# Altium PCB filter_bank.PcbDoc
Units mil, origin at the board's own origin, x right, y up, seen from the top; angles counter-clockwise.
Board outline 1893.7 x 1338.58 mil, 2 copper layers (Top Layer, Bottom Layer); 109 components, 71 nets, 276 pads, 914 vias.
Unrouted connection lines stored in the file: 13.
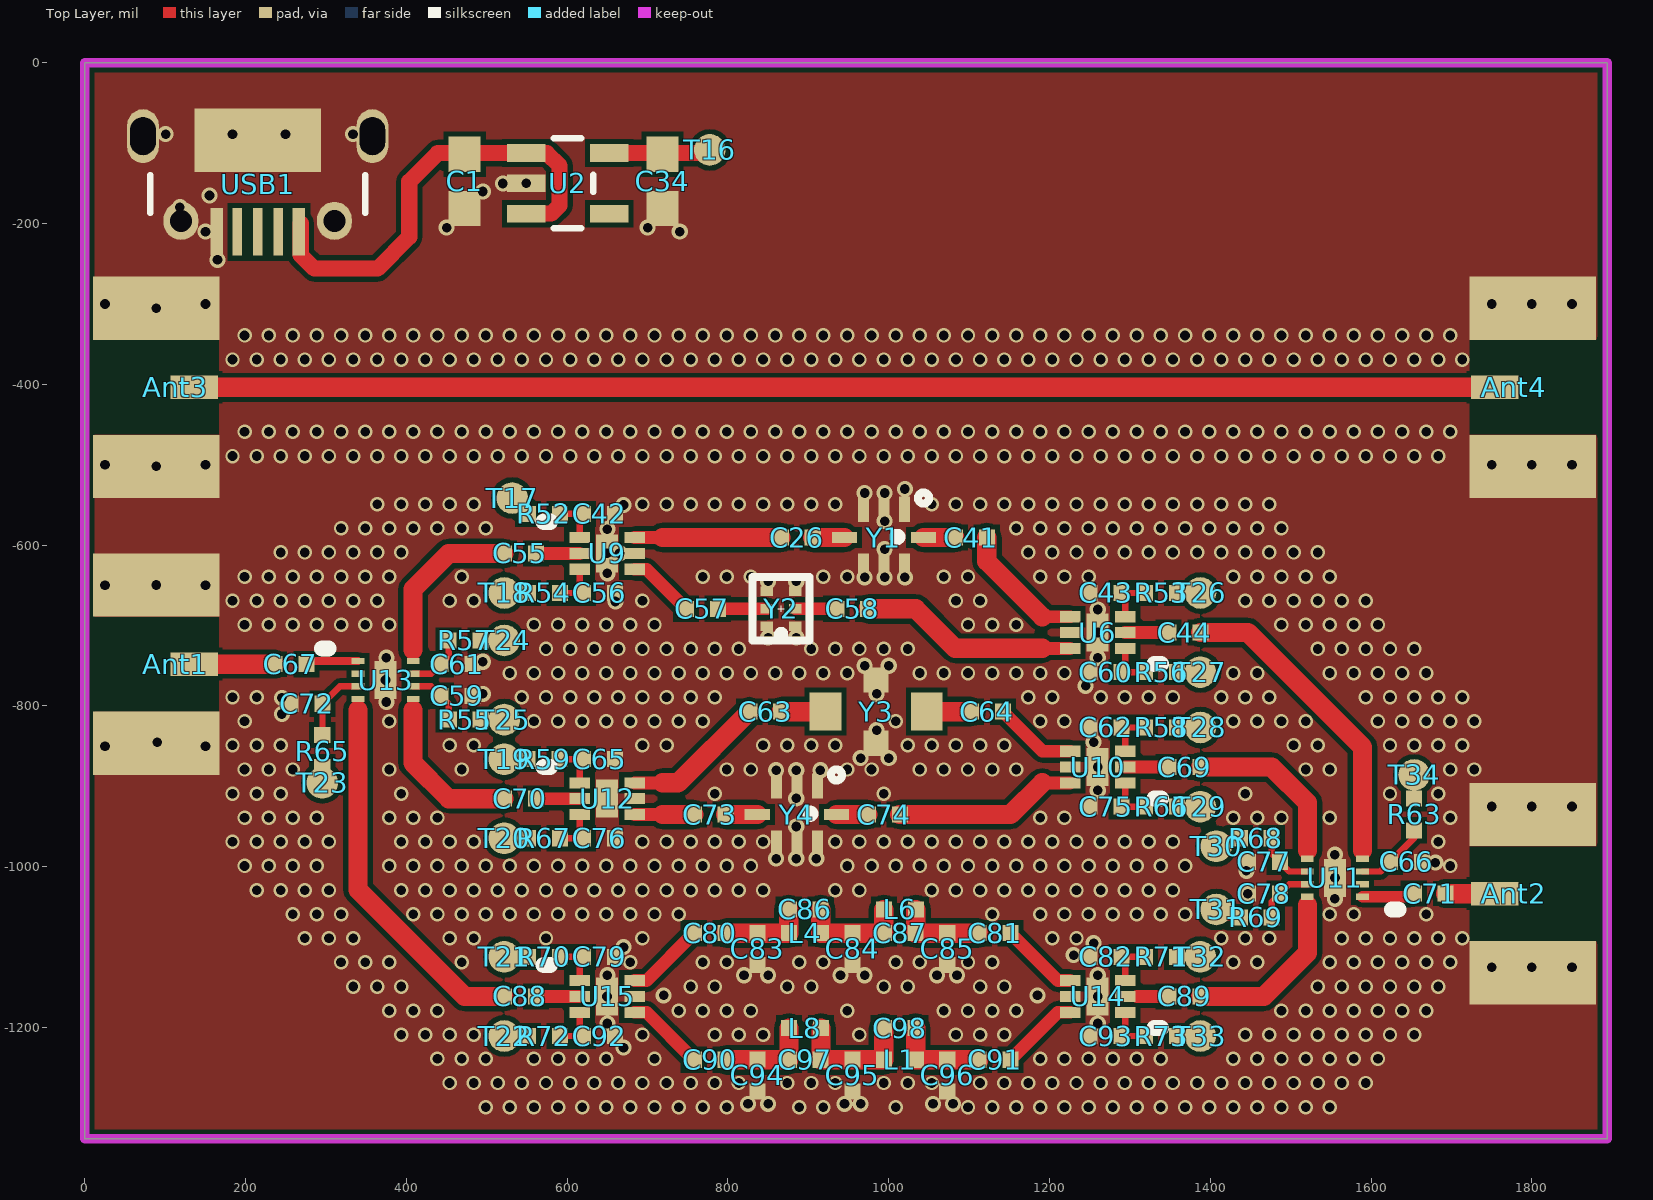
[diagram p0: Top Layer view]
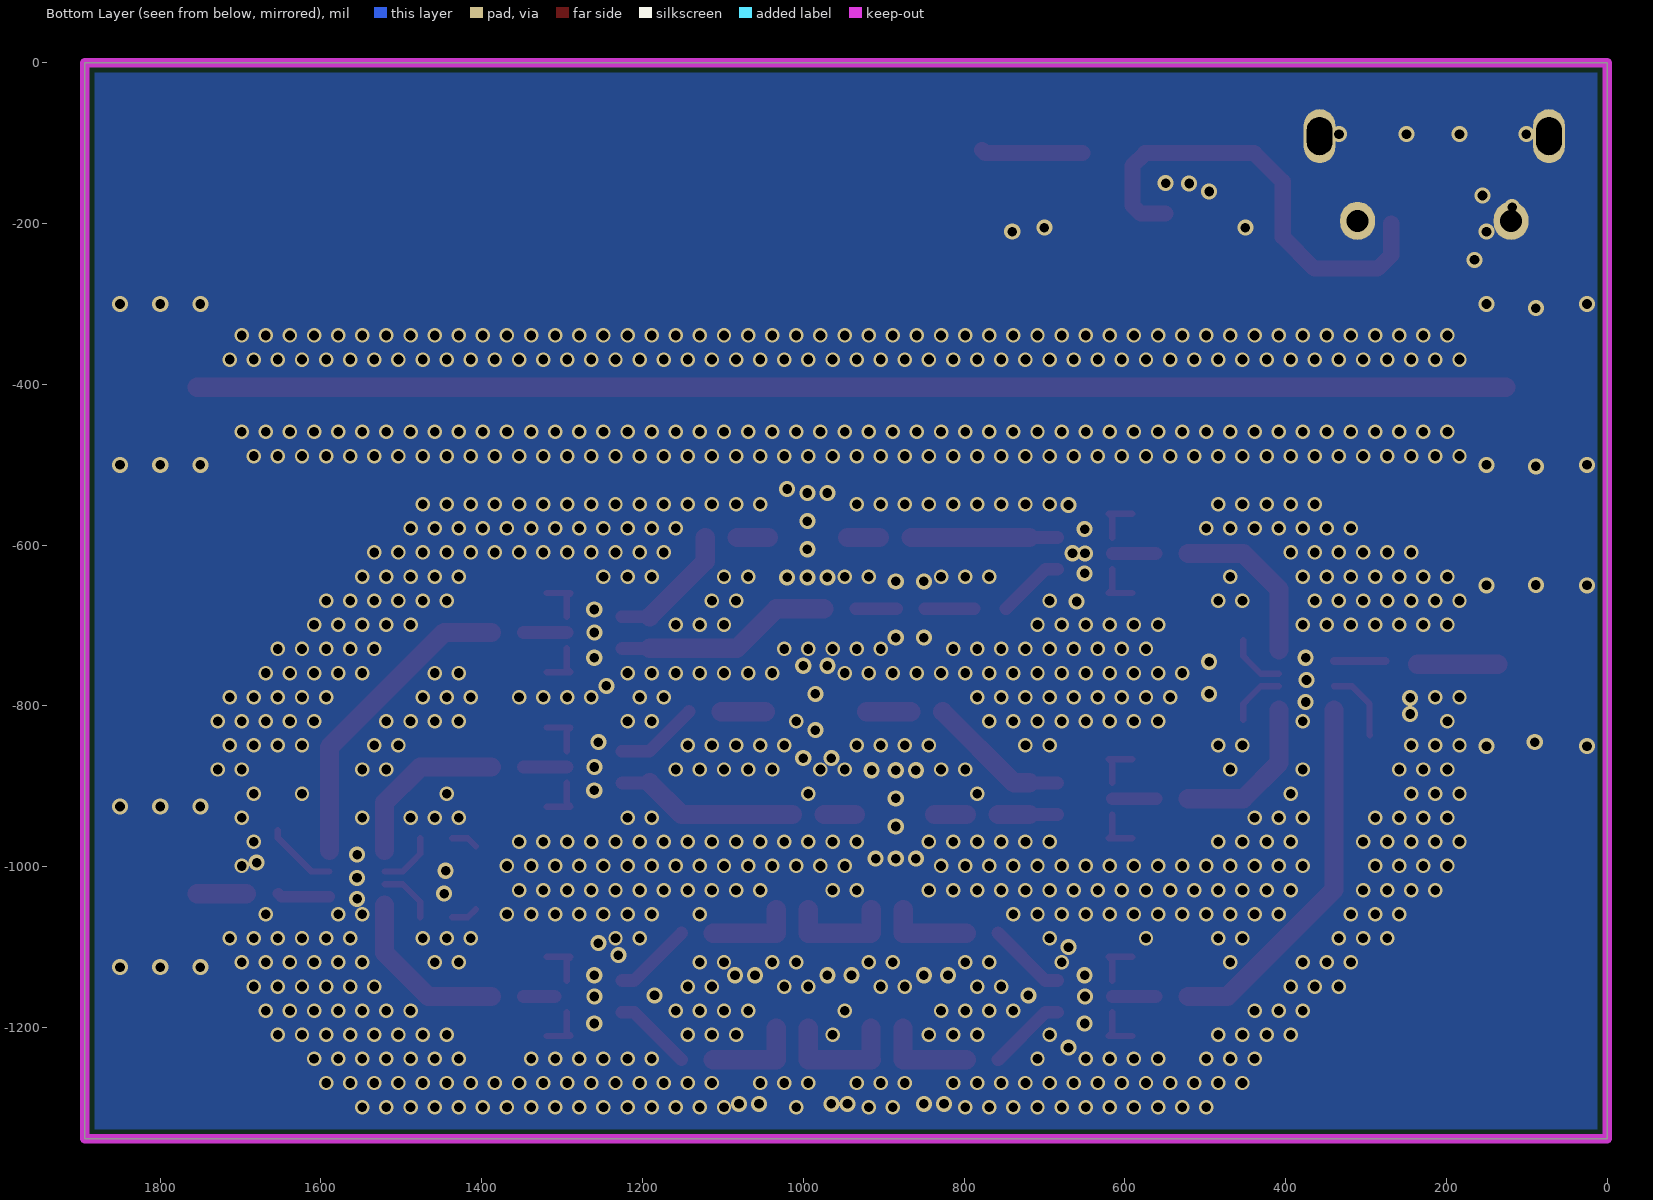
[diagram p1: Bottom Layer view, seen from below]

## Layer stack, top to bottom
Top Solder: solder mask 0.4, Solder Resist, Dk 3.5
Top Layer: signal copper 1.4
Dielectric 1: dielectric 12.6, FR-4, Dk 4.8
Bottom Layer: signal copper 1.4
Bottom Solder: solder mask 0.4, Solder Resist, Dk 3.5

## Board outline
0,-1338.58 0,0 1893.7,0 1893.7,-1338.58

## Design rules (kind name [scope] priority, off if disabled: settings)
Clearance [All] p1: gap=6
MinimumSolderMaskSliver [All] p1 off: minsoldermaskwidth=10
PlaneConnect [All] p1: planeconnectstyle=Direct reliefexpansion=20 reliefentries=4 reliefconductorwidth=10 reliefairgap=10
PolygonConnect [All] p1: connectstyle=Direct reliefconductorwidth=10 reliefentries=4 polygonreliefangle="90 Angle" airgapwidth=10
RoomDefinition power [InComponentClass('power')] p1: confinementstyle=ConfineIn formatcopy=TRUE lockcomponents=FALSE outline 2836.6,-1092.52 4293.29,-1092.52 4293.29,-600.4 2836.6,-600.4
RoomDefinition filter_bank [InComponentClass('filter_bank')] p2 off: confinementstyle=ConfineIn formatcopy=TRUE lockcomponents=FALSE outline 2598.71,-44.1 -203.29,-44.1 -203.29,-2002.1 2598.71,-2002.1
RoutingVias [All] p1: holewidth=11.81 width=19.68 viastyle="Through Hole" minholewidth=11.81 minwidth=19.68 maxholewidth=28 maxwidth=50
SilkToBoardRegionClearance [All] p1 off:
SilkToSilkClearance [All] p1 off: silktosilkclearance=10
SilkToSolderMaskClearance [IsPad] p1 off: minsilkscreentomaskgap=10 clearancetoexposedcopper=TRUE
SolderMaskExpansion [All] p1: expansion=4
UnpouredPolygon [All] p1: allowunpoured=FALSE
Width [All] p1: maxlimit=30 minlimit=6 preferedwidth=10
24 further rules are at their usual default settings.

## Classes and differential pairs
component class filter_bank: C26 C41 C42 C43 C44 C55 C56 C57 C58 C59 C60 C61 C62 C63 C64 C65 C66 C67 C69 C70 C71 C72 C73 C74 C75 C76 C77 C78 C79 C80 C81 C82 C83 C84 C85 C86 C87 C88 C89 C90 C91 C92 C93 C94 C95 C96 C97 C98 L1 L4 L6 L8 R52 R53 R54 R55 R56 R57 R58 R59 R63 R65 R66 R67 R68 R69 R70 R71 R72 R73 U6 U9 U10 U11 U12 U13 U14 U15 Y1 Y2 Y3 Y4
component class power: Ant1 Ant2 Ant3 Ant4 C1 C34 T16 U2 USB1

## Components (designator, comment, footprint, x,y, rotation, side; value= is the part's Value field where it differs from the comment)
Ant1 "Antenna" SMA-2 88.58,-649.61 r270 top
Ant2 "Antenna" SMA-2 1801.18,-1131.89 r90 top
Ant3 "Antenna" SMA-2 88.58,-305.12 r270 top
Ant4 "Antenna" SMA-2 1801.18,-501.97 r90 top
C1 "4.7uF" 0603 472.44,-147.64 r90 top
C26 "10pF" 0402 885.83,-590.55 r180 top
C34 "4.7uF" 0603 718.5,-147.64 r90 top
C41 "10pF" 0402 1102.36,-590.55 r180 top
C42 "47pF" 0402 639.76,-561.02 r180 top
C43 "47pF" 0402 1269.69,-659.45 r0 top
C44 "10pF" 0402 1368.11,-708.66 r180 top
C55 "10pF" 0402 541.34,-610.24 r180 top
C56 "47pF" 0402 639.76,-659.45 r180 top
C57 "10pF" 0402 767.72,-679.13 r180 top
C58 "10pF" 0402 954.72,-679.13 r180 top
C59 "47pF" 0402 462.6,-787.4 r180 top
C60 "47pF" 0402 1269.69,-757.87 r0 top
C61 "47pF" 0402 462.6,-748.03 r180 top
C62 "47pF" 0402 1269.69,-826.77 r0 top
C63 "22pF" 0402 846.46,-807.09 r180 top
C64 "22pF" 0402 1122.05,-807.09 r0 top
C65 "47pF" 0402 639.76,-866.14 r180 top
C66 "47pF" 0402 1643.7,-994.09 r180 top
C67 "47pF" 0402 255.91,-748.03 r180 top
C69 "22pF" 0402 1368.11,-875.98 r180 top
C70 "22pF" 0402 541.34,-915.35 r180 top
C71 "47pF" 0402 1673.23,-1033.46 r180 top
C72 "47pF" 0402 275.59,-797.24 r0 top
C73 "47pF" 0402 777.56,-935.04 r180 top
C74 "47pF" 0402 994.09,-935.04 r180 top
C75 "47pF" 0402 1269.69,-925.2 r0 top
C76 "47pF" 0402 639.76,-964.57 r180 top
C77 "47pF" 0402 1466.54,-994.09 r0 top
C78 "47pF" 0402 1466.54,-1033.47 r0 top
C79 "47pF" 0402 639.76,-1112.21 r180 top
C80 "100pF" 0402 777.56,-1082.68 r180 top
C81 "100pF" 0402 1131.89,-1082.68 r180 top
C82 "47pF" 0402 1269.69,-1112.21 r0 top
C83 "NC" 0402 836.61,-1102.36 r90 top
C84 "NC" 0402 954.72,-1102.36 r90 top
C85 "NC" 0402 1072.84,-1102.36 r90 top
C86 "NC" 0402 895.67,-1053.15 r180 top
C87 "NC" 0402 1013.78,-1082.68 r180 top
C88 "1nF" 0402 541.34,-1161.42 r180 top
C89 "1nF" 0402 1368.11,-1161.42 r180 top
C90 "1nF" 0402 777.56,-1240.16 r180 top
C91 "1nF" 0402 1131.89,-1240.16 r180 top
C92 "47pF" 0402 639.76,-1210.63 r180 top
C93 "47pF" 0402 1269.69,-1210.63 r0 top
C94 "NC" 0402 836.61,-1259.84 r90 top
C95 "NC" 0402 954.72,-1259.84 r90 top
C96 "NC" 0402 1072.84,-1259.84 r90 top
C97 "NC" 0402 895.67,-1240.16 r180 top
C98 "NC" 0402 1013.78,-1200.79 r180 top
L1 "0R" 0402 1013.78,-1240.16 r0 top
L4 "0R" 0402 895.67,-1082.68 r0 top
L6 "0R" 0402 1013.78,-1053.15 r0 top
L8 "0R" 0402 895.67,-1200.79 r0 top
R52 "200" 0402 570.87,-561.02 r0 top
R53 "200" 0402 1338.58,-659.45 r0 top
R54 "200" 0402 570.87,-659.45 r0 top
R55 "200" 0402 472.44,-816.93 r0 top
R56 "200" 0402 1338.58,-757.87 r0 top
R57 "200" 0402 472.44,-718.5 r180 top
R58 "200" 0402 1338.58,-826.77 r0 top
R59 "200" 0402 570.87,-866.14 r180 top
R63 "200" 0402 1653.54,-935.04 r90 top
R65 "200" 0402 295.28,-856.3 r90 top
R66 "200" 0402 1338.58,-925.2 r0 top
R67 "200" 0402 570.87,-964.57 r0 top
R68 "200" 0402 1456.69,-964.57 r180 top
R69 "200" 0402 1456.69,-1062.99 r180 top
R70 "200" 0402 570.87,-1112.21 r0 top
R71 "200" 0402 1338.58,-1112.21 r0 top
R72 "200" 0402 570.87,-1210.63 r0 top
R73 "200" 0402 1338.58,-1210.63 r0 top
T16 "TestPad" "TestPad - 1mm" 777.56,-108.27 r90 top
T17 "TestPad" "TestPad - 1mm" 531.5,-541.34 r90 top (schematic designator T16)
T18 "TestPad" "TestPad - 1mm" 521.65,-659.45 r90 top (schematic designator T16)
T19 "TestPad" "TestPad - 1mm" 521.65,-866.14 r90 top (schematic designator T16)
T20 "TestPad" "TestPad - 1mm" 521.65,-964.57 r90 top (schematic designator T16)
T21 "TestPad" "TestPad - 1mm" 521.65,-1112.2 r90 top (schematic designator T16)
T22 "TestPad" "TestPad - 1mm" 521.65,-1210.63 r90 top (schematic designator T16)
T23 "TestPad" "TestPad - 1mm" 295.28,-895.67 r90 top (schematic designator T16)
T24 "TestPad" "TestPad - 1mm" 521.65,-718.5 r90 top (schematic designator T16)
T25 "TestPad" "TestPad - 1mm" 521.65,-816.93 r90 top (schematic designator T16)
T26 "TestPad" "TestPad - 1mm" 1387.8,-659.45 r90 top (schematic designator T16)
T27 "TestPad" "TestPad - 1mm" 1387.8,-757.87 r90 top (schematic designator T16)
T28 "TestPad" "TestPad - 1mm" 1387.8,-826.77 r90 top (schematic designator T16)
T29 "TestPad" "TestPad - 1mm" 1387.8,-925.2 r90 top (schematic designator T16)
T30 "TestPad" "TestPad - 1mm" 1407.48,-974.41 r90 top (schematic designator T16)
T31 "TestPad" "TestPad - 1mm" 1407.48,-1053.15 r90 top (schematic designator T16)
T32 "TestPad" "TestPad - 1mm" 1387.8,-1112.2 r90 top (schematic designator T16)
T33 "TestPad" "TestPad - 1mm" 1387.8,-1210.63 r90 top (schematic designator T16)
T34 "TestPad" "TestPad - 1mm" 1653.54,-885.83 r90 top (schematic designator T16)
U2 "LP5907" SOT23-5 600.39,-149.59 r270 top
U6 "SKY13320" SKY65404-31 1259.84,-708.66 r180 top
U9 "SKY13320" SKY65404-31 649.61,-610.24 r0 top
U10 "SKY13320" SKY65404-31 1259.84,-875.98 r180 top
U11 "SKY13417" SKY13317 1555.12,-1013.78 r180 top
U12 "SKY13320" SKY65404-31 649.61,-915.35 r0 top
U13 "SKY13417" SKY13317 374.02,-767.72 r0 top
U14 "SKY13320" SKY65404-31 1259.84,-1161.42 r180 top
U15 "SKY13320" SKY65404-31 649.61,-1161.42 r0 top
USB1 "USB Micro Type B" MICRO-YZX 215,20 r180 top
Y1 "5515LP15A730/0868LP15A020" 5515LP15A730/0868LP15A020 994.09,-590.55 r180 top
Y2 "3550LP14A300" 3550LP14A300 866.14,-679.13 r0 top
Y3 "1748LP18A075" 1748LP18A075 984.25,-807.09 r0 top
Y4 "5515LP15A730/0868LP15A020" 5515LP15A730/0868LP15A020 885.83,-935.04 r180 top

## Footprints (in the part's own frame and the unit in brackets; to place one, negate y for a bottom-side part, rotate by r counter-clockwise, add the part's x,y. Pads: shape width x height; smd on the part's side, far side on the other; paste and mask are expansions set on the pad)
0402 [mil] "0402-RES"
  rect 20x20 smd: 1(-19.68,0) 2(20,0)
0603 [mil] "0603-RES"
  rect 44x40 smd: 1(-33.46,0) 2(34,0)
1748LP18A075 [mm]
  rect 1x1.2 smd: 1(-1.6,0) 2(1.6,0)
  rect 0.8x0.8 smd: 3(0,-1) 4(0,1)
  body extent -1.6,-0.8 1.6,0.8, height 1
3550LP14A300 [mm]
  rect 0.4x0.3 smd: 1(-0.45,0.55) 2(-0.45,0) 3(-0.45,-0.55) 4(0.45,-0.55) 5(0.45,0) 6(0.45,0.55)
  silkscreen extent -0.9,-1 0.9,1, body extent -0.4,-0.8 0.4,0.8, height 0.6
5515LP15A730/0868LP15A020 [mm]
  rect 0.35x0.8 smd: 1(-0.65,-0.9) 2(0,-0.9) 3(0.65,-0.9) 5(0.65,0.9) 6(0,0.9) 7(-0.65,0.9)
  rect 0.8x0.35 smd: 4(1.25,0) 8(-1.25,0)
  silkscreen extent -1.43,-1.42 -0.3,0.1, body extent -1,-0.6 1,0.6, height 0.85
MICRO-YZX [mm]
  rect 0.4x1.5 smd: 1(-1.3,5.85) 5(1.3,5.85)
  rect 0.3x1.5 smd: 2(-0.65,5.85) 3(0,5.85) 4(0.65,5.85)
  oval 1x1.7 hole 0.8 slot 1.2 at 90 deg: 5(-3.625,2.82) 5(3.625,2.82)
  oval 1.1x1.2 hole 0.7: 5(-2.425,5.5) 5(2.425,5.5)
  rect 4x2 smd: 5(0,2.95)
  silkscreen extent -3.4,4.05 3.4,5.25, body extent -4.02,0.33 3.98,5.93, height 2.6
SKY13317 [mm]
  rect 0.7x1.2 smd: 0(0,0)
  rect 0.4x0.2 smd: 1(-0.87,0.6) 2(-0.87,0.2) 3(-0.87,-0.2) 4(-0.87,-0.6) 5(0.87,-0.6) 6(0.87,-0.2) 7(0.87,0.2) 8(0.87,0.6)
  silkscreen extent -2,1 -1.8,1, body extent -0.75,-0.75 0.75,0.75, height 0.45
SKY65404-31 [mm]
  rect 0.7x1.2 smd: 0(0,0)
  rect 0.65x0.35 smd: 1(-0.87,0.5) 2(-0.87,0) 3(-0.87,-0.5) 4(0.87,-0.5) 5(0.87,0) 6(0.87,0.5)
  silkscreen extent -2,1 -1.8,1, body extent -0.75,-0.75 0.75,0.75, height 0.45
SMA-2 [mm]
  rect 0.75x1.5 smd: 1(2.5,1.2)
  rect 2x4 smd: GND(0,0) GND(5,0)
  Top Layer pour cut-out: 1,2 4,2 4,-2 1,-2
SOT23-5 [mil] "SOT23-5"
  rect 22x48 smd: 1(-37.4,-51.19) 2(0,-51.19) 3(38,-51.19) 4(38,52) 5(-37.4,52)
  silkscreen extent -56,-17 56,32
"TestPad - 1mm" [mm]
  round 1 smd: 1(0,0)

## Part data
C1 C26 C34 C41 C42 C43 C44 C55 C56 C57 C58 C59 C60 C61 C62 C63 C64 C65 C66 C67 C69 C70 C71 C72 C73 C74 C75 C76 C77 C78 C79 C80 C81 C82 C83 C84 C85 C86 C87 C88 C89 C90 C91 C92 C93 C94 C95 C96 C97 C98: library part Cap, "Capacitor"
L1 L4 L6 L8: library part L/2.5*2.0
R52 R53 R54 R55 R56 R57 R58 R59 R63 R65 R66 R67 R68 R69 R70 R71 R72 R73: library part Res2, "Resistor"
USB1: library part USB_Micro_TypeB, "Connector SMD USB Micro Type B middle mount"

## Via types
v1: diameter 18, hole 12, Top Layer to Bottom Layer, tented both sides, 800 vias
v2: diameter 20, hole 12, Top Layer to Bottom Layer, tented both sides, 114 vias

## Nets (pads, with @x,y where several pads share a name; then routed paths per layer and width w, separated by ;. In a path a pad name is that pad's centre, name@x,y a point inside that pad or via, vN(x,y) a via of type N, cw(c..) or ccw(c..) an arc to the next point about the centre after c; other vN are vias at no path point)
3.3: C34.2 T16.1 U2.5 | length 126.8
  Top Layer w20: U2.5 773.64,-112.19 T16.1
GND: Ant1.GND Ant2.GND Ant3.GND Ant4.GND C1.1 C34.1 C42.1 C43.1 C56.1 C59.1 C60.1 C61.1 C62.1 C65.1 C66.1 C72.1 C75.1 C76.1 C77.1 C78.1 C79.1 C82.1 C83.1 C84.1 C85.1 C92.1 C93.1 C94.1 C95.1 C96.1 U2.2 U6.0 U6.5 U9.0 U9.5 U10.0 U10.5 U11.0 U12.0 U12.5 U13.0 U14.0 U14.5 U15.0 U15.5 USB1.5 Y1.1 Y1.2 Y1.3 Y1.5 Y1.6 Y1.7 Y2.1 Y2.3 Y2.4 Y2.6 Y3.3 Y3.4 Y4.1 Y4.2 Y4.3 Y4.5 Y4.6 Y4.7
  other v1: 498.62,-1299.06 528.62,-1299.06 558.62,-1299.06 588.62,-1299.06 618.62,-1299.06 648.62,-1299.06 678.62,-1299.06 708.62,-1299.06 738.62,-1299.06 768.62,-1299.06 798.62,-1299.06 888.62,-1299.06 918.62,-1299.06 1008.62,-1299.06 1098.62,-1299.06 1128.62,-1299.06 1158.62,-1299.06 1188.62,-1299.06 1218.62,-1299.06 1248.62,-1299.06 1278.62,-1299.06 1308.62,-1299.06 1338.62,-1299.06 1368.62,-1299.06 1398.62,-1299.06 1428.62,-1299.06 1458.62,-1299.06 1488.62,-1299.06 1518.62,-1299.06 1548.62,-1299.06 453.62,-1269.06 483.62,-1269.06 513.62,-1269.06 543.62,-1269.06 573.62,-1269.06 603.62,-1269.06 633.62,-1269.06 663.62,-1269.06 693.62,-1269.06 723.62,-1269.06 753.62,-1269.06 783.62,-1269.06 813.62,-1269.06 873.62,-1269.06 903.62,-1269.06 933.62,-1269.06 993.62,-1269.06 1023.62,-1269.06 1053.62,-1269.06 1113.62,-1269.06 1143.62,-1269.06 1173.62,-1269.06 1203.62,-1269.06 1233.62,-1269.06 1263.62,-1269.06 1293.62,-1269.06 1323.62,-1269.06 1353.62,-1269.06 1383.62,-1269.06 1413.62,-1269.06 1443.62,-1269.06 1473.62,-1269.06 1503.62,-1269.06 1533.62,-1269.06 1563.62,-1269.06 1593.62,-1269.06 438.62,-1239.06 468.62,-1239.06 498.62,-1239.06 558.62,-1239.06 588.62,-1239.06 618.62,-1239.06 648.62,-1239.06 708.62,-1239.06 1188.62,-1239.06 1218.62,-1239.06 1248.62,-1239.06 1278.62,-1239.06 1308.62,-1239.06 1338.62,-1239.06 1428.62,-1239.06 1458.62,-1239.06 1488.62,-1239.06 1518.62,-1239.06 1548.62,-1239.06 1578.62,-1239.06 1608.62,-1239.06 393.62,-1209.06 423.62,-1209.06 453.62,-1209.06 483.62,-1209.06 693.62,-1209.06 783.62,-1209.06 813.62,-1209.06 843.62,-1209.06 963.62,-1209.06 1083.62,-1209.06 1113.62,-1209.06 1143.62,-1209.06 1443.62,-1209.06 1473.62,-1209.06 1503.62,-1209.06 1533.62,-1209.06 1563.62,-1209.06 1593.62,-1209.06 1623.62,-1209.06 1653.62,-1209.06 378.62,-1179.06 408.62,-1179.06 438.62,-1179.06 738.62,-1179.06 768.62,-1179.06 798.62,-1179.06 828.62,-1179.06 948.62,-1179.06 1068.62,-1179.06 1098.62,-1179.06 1128.62,-1179.06 1158.62,-1179.06 1488.62,-1179.06 1518.62,-1179.06 1548.62,-1179.06 1578.62,-1179.06 1608.62,-1179.06 1638.62,-1179.06 1668.62,-1179.06 333.62,-1149.06 363.62,-1149.06 393.62,-1149.06 753.62,-1149.06 783.62,-1149.06 873.62,-1149.06 903.62,-1149.06 993.62,-1149.06 1023.62,-1149.06 1113.62,-1149.06 1143.62,-1149.06 1533.62,-1149.06 1563.62,-1149.06 1593.62,-1149.06 1623.62,-1149.06 1653.62,-1149.06 1683.62,-1149.06 318.62,-1119.06 348.62,-1119.06 378.62,-1119.06 468.62,-1119.06 678.62,-1119.06 768.62,-1119.06 798.62,-1119.06 888.62,-1119.06 918.62,-1119.06 1008.62,-1119.06 1038.62,-1119.06 1098.62,-1119.06 1128.62,-1119.06 1428.62,-1119.06 1458.62,-1119.06 1548.62,-1119.06 1578.62,-1119.06 1608.62,-1119.06 1638.62,-1119.06 1668.62,-1119.06 1698.62,-1119.06 273.62,-1089.06 303.62,-1089.06 333.62,-1089.06 453.62,-1089.06 483.62,-1089.06 573.62,-1089.06 693.62,-1089.06 1203.62,-1089.06 1233.62,-1089.06 1413.62,-1089.06 1443.62,-1089.06 1473.62,-1089.06 1563.62,-1089.06 1593.62,-1089.06 1623.62,-1089.06 1653.62,-1089.06 1683.62,-1089.06 1713.62,-1089.06 258.62,-1059.06 288.62,-1059.06 318.62,-1059.06 408.62,-1059.06 438.62,-1059.06 468.62,-1059.06 498.62,-1059.06 528.62,-1059.06 558.62,-1059.06 588.62,-1059.06 618.62,-1059.06 648.62,-1059.06 678.62,-1059.06 708.62,-1059.06 738.62,-1059.06 1128.62,-1059.06 1188.62,-1059.06 1218.62,-1059.06 1248.62,-1059.06 1278.62,-1059.06 1308.62,-1059.06 1338.62,-1059.06 1368.62,-1059.06 1548.62,-1059.06 1578.62,-1059.06 1668.62,-1059.06 213.62,-1029.06 243.62,-1029.06 273.62,-1029.06 303.62,-1029.06 393.62,-1029.06 423.62,-1029.06 453.62,-1029.06 483.62,-1029.06 513.62,-1029.06 543.62,-1029.06 573.62,-1029.06 603.62,-1029.06 633.62,-1029.06 663.62,-1029.06 693.62,-1029.06 723.62,-1029.06 753.62,-1029.06 783.62,-1029.06 813.62,-1029.06 843.62,-1029.06 933.62,-1029.06 963.62,-1029.06 1053.62,-1029.06 1083.62,-1029.06 1113.62,-1029.06 1143.62,-1029.06 1173.62,-1029.06 1203.62,-1029.06 1233.62,-1029.06 1263.62,-1029.06 1293.62,-1029.06 1323.62,-1029.06 1353.62,-1029.06 198.62,-999.06 228.62,-999.06 258.62,-999.06 288.62,-999.06 378.62,-999.06 408.62,-999.06 438.62,-999.06 468.62,-999.06 498.62,-999.06 528.62,-999.06 558.62,-999.06 588.62,-999.06 618.62,-999.06 648.62,-999.06 678.62,-999.06 708.62,-999.06 738.62,-999.06 768.62,-999.06 798.62,-999.06 828.62,-999.06 948.62,-999.06 978.62,-999.06 1008.62,-999.06 1038.62,-999.06 1068.62,-999.06 1098.62,-999.06 1128.62,-999.06 1158.62,-999.06 1188.62,-999.06 1218.62,-999.06 1248.62,-999.06 1278.62,-999.06 1308.62,-999.06 1338.62,-999.06 1368.62,-999.06 1698.62,-999.06 183.62,-969.06 213.62,-969.06 243.62,-969.06 273.62,-969.06 303.62,-969.06 393.62,-969.06 423.62,-969.06 453.62,-969.06 483.62,-969.06 693.62,-969.06 723.62,-969.06 753.62,-969.06 783.62,-969.06 813.62,-969.06 843.62,-969.06 933.62,-969.06 963.62,-969.06 993.62,-969.06 1023.62,-969.06 1053.62,-969.06 1083.62,-969.06 1113.62,-969.06 1143.62,-969.06 1173.62,-969.06 1203.62,-969.06 1233.62,-969.06 1263.62,-969.06 1293.62,-969.06 1323.62,-969.06 1353.62,-969.06 1683.62,-969.06 198.62,-939.06 228.62,-939.06 258.62,-939.06 288.62,-939.06 378.62,-939.06 408.62,-939.06 438.62,-939.06 1188.62,-939.06 1218.62,-939.06 1428.62,-939.06 1458.62,-939.06 1488.62,-939.06 1548.62,-939.06 1698.62,-939.06 183.62,-909.06 213.62,-909.06 243.62,-909.06 393.62,-909.06 783.62,-909.06 993.62,-909.06 1443.62,-909.06 1623.62,-909.06 1683.62,-909.06 198.62,-879.06 228.62,-879.06 258.62,-879.06 378.62,-879.06 468.62,-879.06 798.62,-879.06 828.62,-879.06 948.62,-879.06 978.62,-879.06 1038.62,-879.06 1068.62,-879.06 1098.62,-879.06 1128.62,-879.06 1158.62,-879.06 1518.62,-879.06 1548.62,-879.06 1698.62,-879.06 1728.62,-879.06 183.62,-849.06 213.62,-849.06 243.62,-849.06 453.62,-849.06 483.62,-849.06 693.62,-849.06 723.62,-849.06 843.62,-849.06 873.62,-849.06 903.62,-849.06 933.62,-849.06 1023.62,-849.06 1053.62,-849.06 1083.62,-849.06 1113.62,-849.06 1143.62,-849.06 1503.62,-849.06 1533.62,-849.06 1623.62,-849.06 1653.62,-849.06 1683.62,-849.06 1713.62,-849.06 198.62,-819.06 378.62,-819.06 558.62,-819.06 588.62,-819.06 618.62,-819.06 648.62,-819.06 678.62,-819.06 708.62,-819.06 738.62,-819.06 768.62,-819.06 1008.62,-819.06 1188.62,-819.06 1218.62,-819.06 1428.62,-819.06 1458.62,-819.06 1488.62,-819.06 1518.62,-819.06 1608.62,-819.06 1638.62,-819.06 1668.62,-819.06 1698.62,-819.06 1728.62,-819.06 183.62,-789.06 213.62,-789.06 543.62,-789.06 573.62,-789.06 603.62,-789.06 633.62,-789.06 663.62,-789.06 693.62,-789.06 723.62,-789.06 753.62,-789.06 783.62,-789.06 1173.62,-789.06 1203.62,-789.06 1263.62,-789.06 1293.62,-789.06 1323.62,-789.06 1353.62,-789.06 1413.62,-789.06 1443.62,-789.06 1473.62,-789.06 1593.62,-789.06 1623.62,-789.06 1653.62,-789.06 1683.62,-789.06 1713.62,-789.06 528.62,-759.06 558.62,-759.06 588.62,-759.06 618.62,-759.06 648.62,-759.06 678.62,-759.06 708.62,-759.06 738.62,-759.06 768.62,-759.06 798.62,-759.06 828.62,-759.06 858.62,-759.06 888.62,-759.06 918.62,-759.06 948.62,-759.06 1038.62,-759.06 1068.62,-759.06 1098.62,-759.06 1128.62,-759.06 1158.62,-759.06 1188.62,-759.06 1218.62,-759.06 1428.62,-759.06 1458.62,-759.06 1548.62,-759.06 1578.62,-759.06 1608.62,-759.06 1638.62,-759.06 1668.62,-759.06 573.62,-729.06 603.62,-729.06 633.62,-729.06 663.62,-729.06 693.62,-729.06 723.62,-729.06 753.62,-729.06 783.62,-729.06 813.62,-729.06 903.62,-729.06 933.62,-729.06 963.62,-729.06 993.62,-729.06 1023.62,-729.06 1533.62,-729.06 1563.62,-729.06 1593.62,-729.06 1623.62,-729.06 1653.62,-729.06 198.62,-699.06 228.62,-699.06 258.62,-699.06 288.62,-699.06 318.62,-699.06 348.62,-699.06 378.62,-699.06 558.62,-699.06 588.62,-699.06 618.62,-699.06 648.62,-699.06 678.62,-699.06 708.62,-699.06 1098.62,-699.06 1128.62,-699.06 1158.62,-699.06 1488.62,-699.06 1518.62,-699.06 1548.62,-699.06 1578.62,-699.06 1608.62,-699.06 183.62,-669.06 213.62,-669.06 243.62,-669.06 273.62,-669.06 303.62,-669.06 333.62,-669.06 363.62,-669.06 453.62,-669.06 483.62,-669.06 693.62,-669.06 1083.62,-669.06 1113.62,-669.06 1443.62,-669.06 1473.62,-669.06 1503.62,-669.06 1533.62,-669.06 1563.62,-669.06 1593.62,-669.06 198.62,-639.06 228.62,-639.06 258.62,-639.06 288.62,-639.06 318.62,-639.06 348.62,-639.06 378.62,-639.06 468.62,-639.06 768.62,-639.06 798.62,-639.06 828.62,-639.06 918.62,-639.06 948.62,-639.06 1068.62,-639.06 1098.62,-639.06 1188.62,-639.06 1218.62,-639.06 1248.62,-639.06 1428.62,-639.06 1458.62,-639.06 1488.62,-639.06 1518.62,-639.06 1548.62,-639.06 243.62,-609.06 273.62,-609.06 303.62,-609.06 333.62,-609.06 363.62,-609.06 393.62,-609.06 1173.62,-609.06 1203.62,-609.06 1233.62,-609.06 1263.62,-609.06 1293.62,-609.06 1323.62,-609.06 1353.62,-609.06 1383.62,-609.06 1413.62,-609.06 1443.62,-609.06 1473.62,-609.06 1503.62,-609.06 1533.62,-609.06 318.62,-579.06 348.62,-579.06 378.62,-579.06 408.62,-579.06 438.62,-579.06 468.62,-579.06 498.62,-579.06 1158.62,-579.06 1188.62,-579.06 1218.62,-579.06 1248.62,-579.06 1278.62,-579.06 1308.62,-579.06 1338.62,-579.06 1368.62,-579.06 1398.62,-579.06 1428.62,-579.06 1458.62,-579.06 1488.62,-579.06 363.62,-549.06 393.62,-549.06 423.62,-549.06 453.62,-549.06 483.62,-549.06 693.62,-549.06 723.62,-549.06 753.62,-549.06 783.62,-549.06 813.62,-549.06 843.62,-549.06 873.62,-549.06 903.62,-549.06 933.62,-549.06 1053.62,-549.06 1083.62,-549.06 1113.62,-549.06 1143.62,-549.06 1173.62,-549.06 1203.62,-549.06 1233.62,-549.06 1263.62,-549.06 1293.62,-549.06 1323.62,-549.06 1353.62,-549.06 1383.62,-549.06 1413.62,-549.06 1443.62,-549.06 1473.62,-549.06 183.62,-489.06 213.62,-489.06 243.62,-489.06 273.62,-489.06 303.62,-489.06 333.62,-489.06 363.62,-489.06 393.62,-489.06 423.62,-489.06 453.62,-489.06 483.62,-489.06 513.62,-489.06 543.62,-489.06 573.62,-489.06 603.62,-489.06 633.62,-489.06 663.62,-489.06 693.62,-489.06 723.62,-489.06 753.62,-489.06 783.62,-489.06 813.62,-489.06 843.62,-489.06 873.62,-489.06 903.62,-489.06 933.62,-489.06 963.62,-489.06 993.62,-489.06 1023.62,-489.06 1053.62,-489.06 1083.62,-489.06 1113.62,-489.06 1143.62,-489.06 1173.62,-489.06 1203.62,-489.06 1233.62,-489.06 1263.62,-489.06 1293.62,-489.06 1323.62,-489.06 1353.62,-489.06 1383.62,-489.06 1413.62,-489.06 1443.62,-489.06 1473.62,-489.06 1503.62,-489.06 1533.62,-489.06 1563.62,-489.06 1593.62,-489.06 1623.62,-489.06 1653.62,-489.06 1683.62,-489.06 198.62,-459.06 228.62,-459.06 258.62,-459.06 288.62,-459.06 318.62,-459.06 348.62,-459.06 378.62,-459.06 408.62,-459.06 438.62,-459.06 468.62,-459.06 498.62,-459.06 528.62,-459.06 558.62,-459.06 588.62,-459.06 618.62,-459.06 648.62,-459.06 678.62,-459.06 708.62,-459.06 738.62,-459.06 768.62,-459.06 798.62,-459.06 828.62,-459.06 858.62,-459.06 888.62,-459.06 918.62,-459.06 948.62,-459.06 978.62,-459.06 1008.62,-459.06 1038.62,-459.06 1068.62,-459.06 1098.62,-459.06 1128.62,-459.06 1158.62,-459.06 1188.62,-459.06 1218.62,-459.06 1248.62,-459.06 1278.62,-459.06 1308.62,-459.06 1338.62,-459.06 1368.62,-459.06 1398.62,-459.06 1428.62,-459.06 1458.62,-459.06 1488.62,-459.06 1518.62,-459.06 1548.62,-459.06 1578.62,-459.06 1608.62,-459.06 1638.62,-459.06 1668.62,-459.06 1698.62,-459.06 183.62,-369.06 213.62,-369.06 243.62,-369.06 273.62,-369.06 303.62,-369.06 333.62,-369.06 363.62,-369.06 393.62,-369.06 423.62,-369.06 453.62,-369.06 483.62,-369.06 513.62,-369.06 543.62,-369.06 573.62,-369.06 603.62,-369.06 633.62,-369.06 663.62,-369.06 693.62,-369.06 723.62,-369.06 753.62,-369.06 783.62,-369.06 813.62,-369.06 843.62,-369.06 873.62,-369.06 903.62,-369.06 933.62,-369.06 963.62,-369.06 993.62,-369.06 1023.62,-369.06 1053.62,-369.06 1083.62,-369.06 1113.62,-369.06 1143.62,-369.06 1173.62,-369.06 1203.62,-369.06 1233.62,-369.06 1263.62,-369.06 1293.62,-369.06 1323.62,-369.06 1353.62,-369.06 1383.62,-369.06 1413.62,-369.06 1443.62,-369.06 1473.62,-369.06 1503.62,-369.06 1533.62,-369.06 1563.62,-369.06 1593.62,-369.06 1623.62,-369.06 1653.62,-369.06 1683.62,-369.06 1713.62,-369.06 198.62,-339.06 228.62,-339.06 258.62,-339.06 288.62,-339.06 318.62,-339.06 348.62,-339.06 378.62,-339.06 408.62,-339.06 438.62,-339.06 468.62,-339.06 498.62,-339.06 528.62,-339.06 558.62,-339.06 588.62,-339.06 618.62,-339.06 648.62,-339.06 678.62,-339.06 708.62,-339.06 738.62,-339.06 768.62,-339.06 798.62,-339.06 828.62,-339.06 858.62,-339.06 888.62,-339.06 918.62,-339.06 948.62,-339.06 978.62,-339.06 1008.62,-339.06 1038.62,-339.06 1068.62,-339.06 1098.62,-339.06 1128.62,-339.06 1158.62,-339.06 1188.62,-339.06 1218.62,-339.06 1248.62,-339.06 1278.62,-339.06 1308.62,-339.06 1338.62,-339.06 1368.62,-339.06 1398.62,-339.06 1428.62,-339.06 1458.62,-339.06 1488.62,-339.06 1518.62,-339.06 1548.62,-339.06 1578.62,-339.06 1608.62,-339.06 1638.62,-339.06 1668.62,-339.06 1698.62,-339.06
  other v2: 825,-1295 850,-1295 945,-1295 965,-1295 1055,-1295 1080,-1295 670,-1225 650,-1195 1260,-1195 649.61,-1161.42 1259.84,-1161.42 720,-1160 1185,-1160 650,-1135 820,-1135 850,-1135 940,-1135 970,-1135 1060,-1135 1085,-1135 1260,-1135 1750,-1125 1800,-1125 1850,-1125 1230,-1110 670,-1100 1255,-1095 1555,-1040 1446.85,-1033.47 1555.12,-1013.78 1445,-1005 1680,-995 860,-990 885,-990 910,-990 1555,-985 885,-950 1750,-925 1800,-925 1850,-925 885,-915 1260,-905 860,-880 885,-880 915,-880 1259.84,-875.98 965,-865 1000,-865 25,-850 150,-850 90,-845 1255,-845 985,-830 245,-810 375,-795 245,-790 495,-785 985,-785 1245,-775 374.02,-767.72 970,-750 1000,-750 495,-745 375,-740 1260,-740 850,-715 885,-715 1259.84,-708.66 1260,-680 660,-670 25,-650 88.58,-649.61 150,-650 850,-645 885,-645 970,-640 995,-640 1020,-640 650,-635 649.61,-610.24 665,-610 995,-605 650,-580 995,-570 670,-550 970,-535 995,-535 1020,-530 88.58,-501.97 25,-500 150,-500 1750,-500 1800,-500 1850,-500 88.58,-305.12 25,-300 150,-300 1750,-300 1800,-300 1850,-300 165,-245 150,-210 740,-210 450,-205 700,-205 118.11,-179.58 155,-165 495,-160 520,-150 549.21,-149.59 100.39,-88.58 183.56,-88.58 249.54,-88.58 333.54,-88.58
NetAnt1_1: Ant1.1 C67.2 | length 100.1
  Top Layer w24: Ant1.1 C67.2
NetAnt2_1: Ant2.1 C71.1 | length 61
  Top Layer w24: C71.1 Ant2.1
NetAnt3_1: Ant3.1 Ant4.1 | length 1628
  Top Layer w24: Ant3.1@125.98,-403.54 Ant4.1
NetC26_1: C26.1 Y1.4 | length 39.4
  Top Layer w24: C26.1 Y1.4
NetC26_2: C26.2 U9.6 | length 182
  Top Layer w16: U9.6 718.5,-590.55
  Top Layer w24: 718.5,-590.55 C26.2
NetC41_1: C41.1 U6.4 | length 161.6
  Top Layer w16: 1190.94,-688.98 U6.4
  Top Layer w24: C41.1 1122.05,-620.08 1190.94,-688.98
NetC41_2: C41.2 Y1.8 | length 39.1
  Top Layer w24: Y1.8 C41.2
NetC42_2: C42.2 R52.2 U9.1 | length 60.3
  Top Layer w8: R52.2 C42.2 615.35,-565.43 U9.1
NetC43_2: C43.2 R53.1 U6.3 | length 60.6
  Top Layer w8: U6.3 1294.1,-663.86 C43.2 R53.1
NetC44_1: C44.1 U11.4 | length 389
  Top Layer w24: C44.1 1446.85,-708.66 1589.37,-851.18 1589.37,-979.53
NetC44_2: C44.2 U6.2 | length 54
  Top Layer w16: U6.2 C44.2
NetC55_1: C55.1 U9.2 | length 54.3
  Top Layer w16: C55.1 U9.2
NetC55_2: C55.2 U13.8 | length 206.8
  Top Layer w24: 408.27,-730 408.27,-654.72 452.76,-610.24 C55.2
NetC56_2: C56.2 R54.2 U9.3 | length 60.3
  Top Layer w8: R54.2 C56.2 615.35,-655.04 U9.3
NetC57_1: C57.1 Y2.2 | length 61
  Top Layer w16: C57.1 Y2.2
NetC57_2: C57.2 U9.4 | length 84.2
  Top Layer w16: U9.4 698.5,-629.92 C57.2
NetC58_1: C58.1 U6.6 | length 271.6
  Top Layer w16: 1190.95,-728.35 U6.6
  Top Layer w24: C58.1 1033.47,-679.13 1082.68,-728.35 1190.94,-728.35
NetC58_2: C58.2 Y2.5 | length 50.9
  Top Layer w16: Y2.5 C58.2
NetC59_2: C59.2 R55.1 U13.6 | length 73
  Top Layer w8: U13.6 430.79,-775.59 C59.2 452.76,-797.56 R55.1
NetC60_2: C60.2 R56.1 U6.1 | length 60.6
  Top Layer w8: U6.1 1294.1,-753.46 C60.2 R56.1
NetC61_2: C61.2 R57.2 U13.7 | length 72.8
  Top Layer w8: U13.7 430.79,-759.84 C61.2 452.44,-738.19 R57.2
NetC62_2: C62.2 R58.1 U10.3 | length 60.6
  Top Layer w8: U10.3 1294.1,-831.18 C62.2 R58.1
NetC63_1: C63.1 Y3.1 | length 55.1
  Top Layer w24: C63.1 Y3.1
NetC63_2: C63.2 U12.6 | length 179.3
  Top Layer w16: U12.6 718.5,-895.67
  Top Layer w24: 718.5,-895.67 737.87,-895.67 C63.2
NetC64_1: C64.1 Y3.2 | length 55.1
  Top Layer w24: Y3.2 C64.1
NetC64_2: C64.2 U10.4 | length 103.9
  Top Layer w16: C64.2 1191.26,-856.3 U10.4
NetC65_2: C65.2 R59.1 U12.1 | length 60.6
  Top Layer w8: R59.1 C65.2 615.35,-870.55 U12.1
NetC66_2: C66.2 R63.1 U11.3 | length 91
  Top Layer w8: U11.3 1611.89,-1005.91 C66.2 1653.54,-964.25 R63.1
NetC67_1: C67.1 U13.1 | length 64.2
  Top Layer w10: C67.1@275.59,-744.1 U13.1
NetC69_1: C69.1 U11.5 | length 210.6
  Top Layer w24: C69.1 1476.38,-875.98 1520.87,-920.47 1520.87,-979.53
NetC69_2: C69.2 U10.2 | length 54
  Top Layer w16: U10.2 C69.2
NetC70_1: C70.1 U12.2 | length 54.3
  Top Layer w16: C70.1 U12.2
NetC70_2: C70.2 U13.5 | length 197.4
  Top Layer w24: 408.27,-805 408.27,-870.87 452.76,-915.35 C70.2
NetC71_2: C71.2 U11.1 | length 65.5
  Top Layer w14: U11.1 1649.29,-1037.4 C71.2
NetC72_2: C72.2 R65.2 U13.3 | length 92.3
  Top Layer w8: R65.2 295.59,-835.98 C72.2 317.24,-775.59 U13.3
NetC73_1: C73.1 Y4.4 | length 39.4
  Top Layer w24: C73.1 Y4.4
NetC73_2: C73.2 U12.4 | length 73.7
  Top Layer w16: U12.4 718.5,-935.04
  Top Layer w24: 718.5,-935.04 C73.2
NetC74_1: C74.1 U10.6 | length 228.1
  Top Layer w16: 1190.95,-895.67 U10.6
  Top Layer w24: C74.1 1151.58,-935.04 1190.94,-895.67
NetC74_2: C74.2 Y4.8 | length 39.1
  Top Layer w24: Y4.8 C74.2
NetC75_2: C75.2 R66.1 U10.1 | length 60.6
  Top Layer w8: U10.1 1294.1,-920.79 C75.2 R66.1
NetC76_2: C76.2 R67.2 U12.3 | length 60.3
  Top Layer w8: R67.2 C76.2 615.35,-960.16 U12.3
NetC77_2: C77.2 R68.1 U11.6 | length 73
  Top Layer w8: R68.1 1476.38,-983.94 C77.2 1498.35,-1005.91 U11.6
NetC78_2: C78.2 R69.1 U11.7 | length 73
  Top Layer w8: R69.1 1476.38,-1043.62 C78.2 1498.35,-1021.65 U11.7
NetC79_2: C79.2 R70.2 U15.1 | length 60.3
  Top Layer w8: R70.2 C79.2 615.35,-1116.61 U15.1
NetC80_1: C80.1 C83.2 C86.2 L4.1 | length 108.4
  Top Layer w24: C80.1 L4.1 875.67,-1082.36 C86.2
NetC80_2: C80.2 U15.6 | length 98.2
  Top Layer w16: U15.6 698.5,-1141.73 C80.2
NetC81_1: C81.1 U14.4 | length 98.5
  Top Layer w16: C81.1 1210.63,-1141.73 U14.4
NetC81_2: C81.2 C85.2 C87.1 L6.2 | length 108.1
  Top Layer w24: L6.2 1033.78,-1082.36 C87.1 C81.2
NetC82_2: C82.2 R71.1 U14.3 | length 60.6
  Top Layer w8: U14.3 1294.09,-1116.61 C82.2 R71.1
NetC84_2: C84.2 C86.1 C87.2 L4.2 L6.1 | length 137.4
  Top Layer w24: C86.1 915.35,-1082.36 L4.2 C87.2 993.78,-1053.47 L6.1
NetC88_1: C88.1 U15.2 | length 54.3
  Top Layer w16: C88.1 U15.2
NetC88_2: C88.2 U13.4 | length 460.3
  Top Layer w24: 339.76,-805 339.76,-1028.74 472.44,-1161.42 C88.2
NetC89_1: C89.1 U11.8 | length 214.6
  Top Layer w24: C89.1 1466.53,-1161.42 1520.87,-1107.09 1520.87,-1048.03
NetC89_2: C89.2 U14.2 | length 39.1
  Top Layer w16: 1309.06,-1161.42 C89.2
NetC90_1: C90.1 C94.2 C97.2 L8.1 | length 117.9
  Top Layer w24: C90.1 C97.2 875.98,-1239.84 L8.1
NetC90_2: C90.2 U15.4 | length 98.2
  Top Layer w16: U15.4 698.5,-1181.1 C90.2
NetC91_1: C91.1 U14.6 | length 98.5
  Top Layer w16: C91.1 1210.63,-1181.1 U14.6
NetC91_2: C91.2 C96.2 C98.1 L1.2 | length 117.6
  Top Layer w24: C98.1 1033.47,-1239.84 L1.2 C91.2
NetC92_2: C92.2 R72.2 U15.3 | length 60.3
  Top Layer w8: R72.2 C92.2 615.35,-1206.22 U15.3
NetC93_2: C93.2 R73.1 U14.1 | length 60.6
  Top Layer w8: U14.1 1294.09,-1206.22 C93.2 R73.1
NetC95_2: C95.2 C97.1 C98.2 L1.1 L8.2 | length 157.7
  Top Layer w24: L8.2 915.67,-1239.84 C97.1 L1.1 993.78,-1239.84 C98.2
NetR52_1: R52.1 R53.2 R58.2 R59.2 R71.2 R72.1 T17.1 T19.1 T22.1 T26.1 T28.1 T32.1
NetR54_1: R54.1 R56.2 R66.2 R67.1 R70.1 R73.2 T18.1 T20.1 T21.1 T27.1 T29.1 T33.1
NetR55_2: R55.2 R68.2 T25.1 T30.1 | length 33.3
  Top Layer w8: T30.1 1417.32,-964.57 R68.2
NetR57_1: R57.1 R69.2 T24.1 T31.1 | length 33.3
  Top Layer w8: T31.1 1417.32,-1062.99 R69.2
NetR63_2: R63.2 R65.1 T23.1 T34.1
NetUSB1_2: USB1.2
NetUSB1_3: USB1.3
VBUS: C1.2 U2.1 U2.3 USB1.1 | length 569.7
  Top Layer w20: USB1.1@268.54,-199.58 268.54,-239.01 285.43,-255.91 364.17,-255.91 403.54,-216.54 403.54,-147.64 438.99,-112.19 U2.1 574.78,-112.19 590.55,-127.95 590.55,-177.17 580.13,-187.59 U2.3
pads on no net: U2.4 U11.2 U13.2 USB1.4

## Polygon pours and split planes (outlines as drawn)
GND on Bottom Layer "Bottom Layer-No Net" (solid, remove dead copper, pour order 2): 0,-1338.58 0,0 1893.7,0 1893.7,-1338.58
GND on Top Layer "Bottom Layer-No Net" (solid, remove dead copper, pour order 5): 0,-1338.58 1893.7,-1338.58 1893.7,0 0,0

## Keep-outs
Keep-Out Layer:
  the board outline again, w12

## Silkscreen, mask and mechanical layers (free items; w line width, h text height)
Top Solder:
  rectangle: 1080,-1045 1230,-985
  rectangle: 1085,-1200 1150,-1135
  rectangle: 675,-1045 800,-980
  rectangle: 750,-1200 805,-1130
  rectangle: 695,-1325 1155,-1280